# Allegro board sensor_board.brd
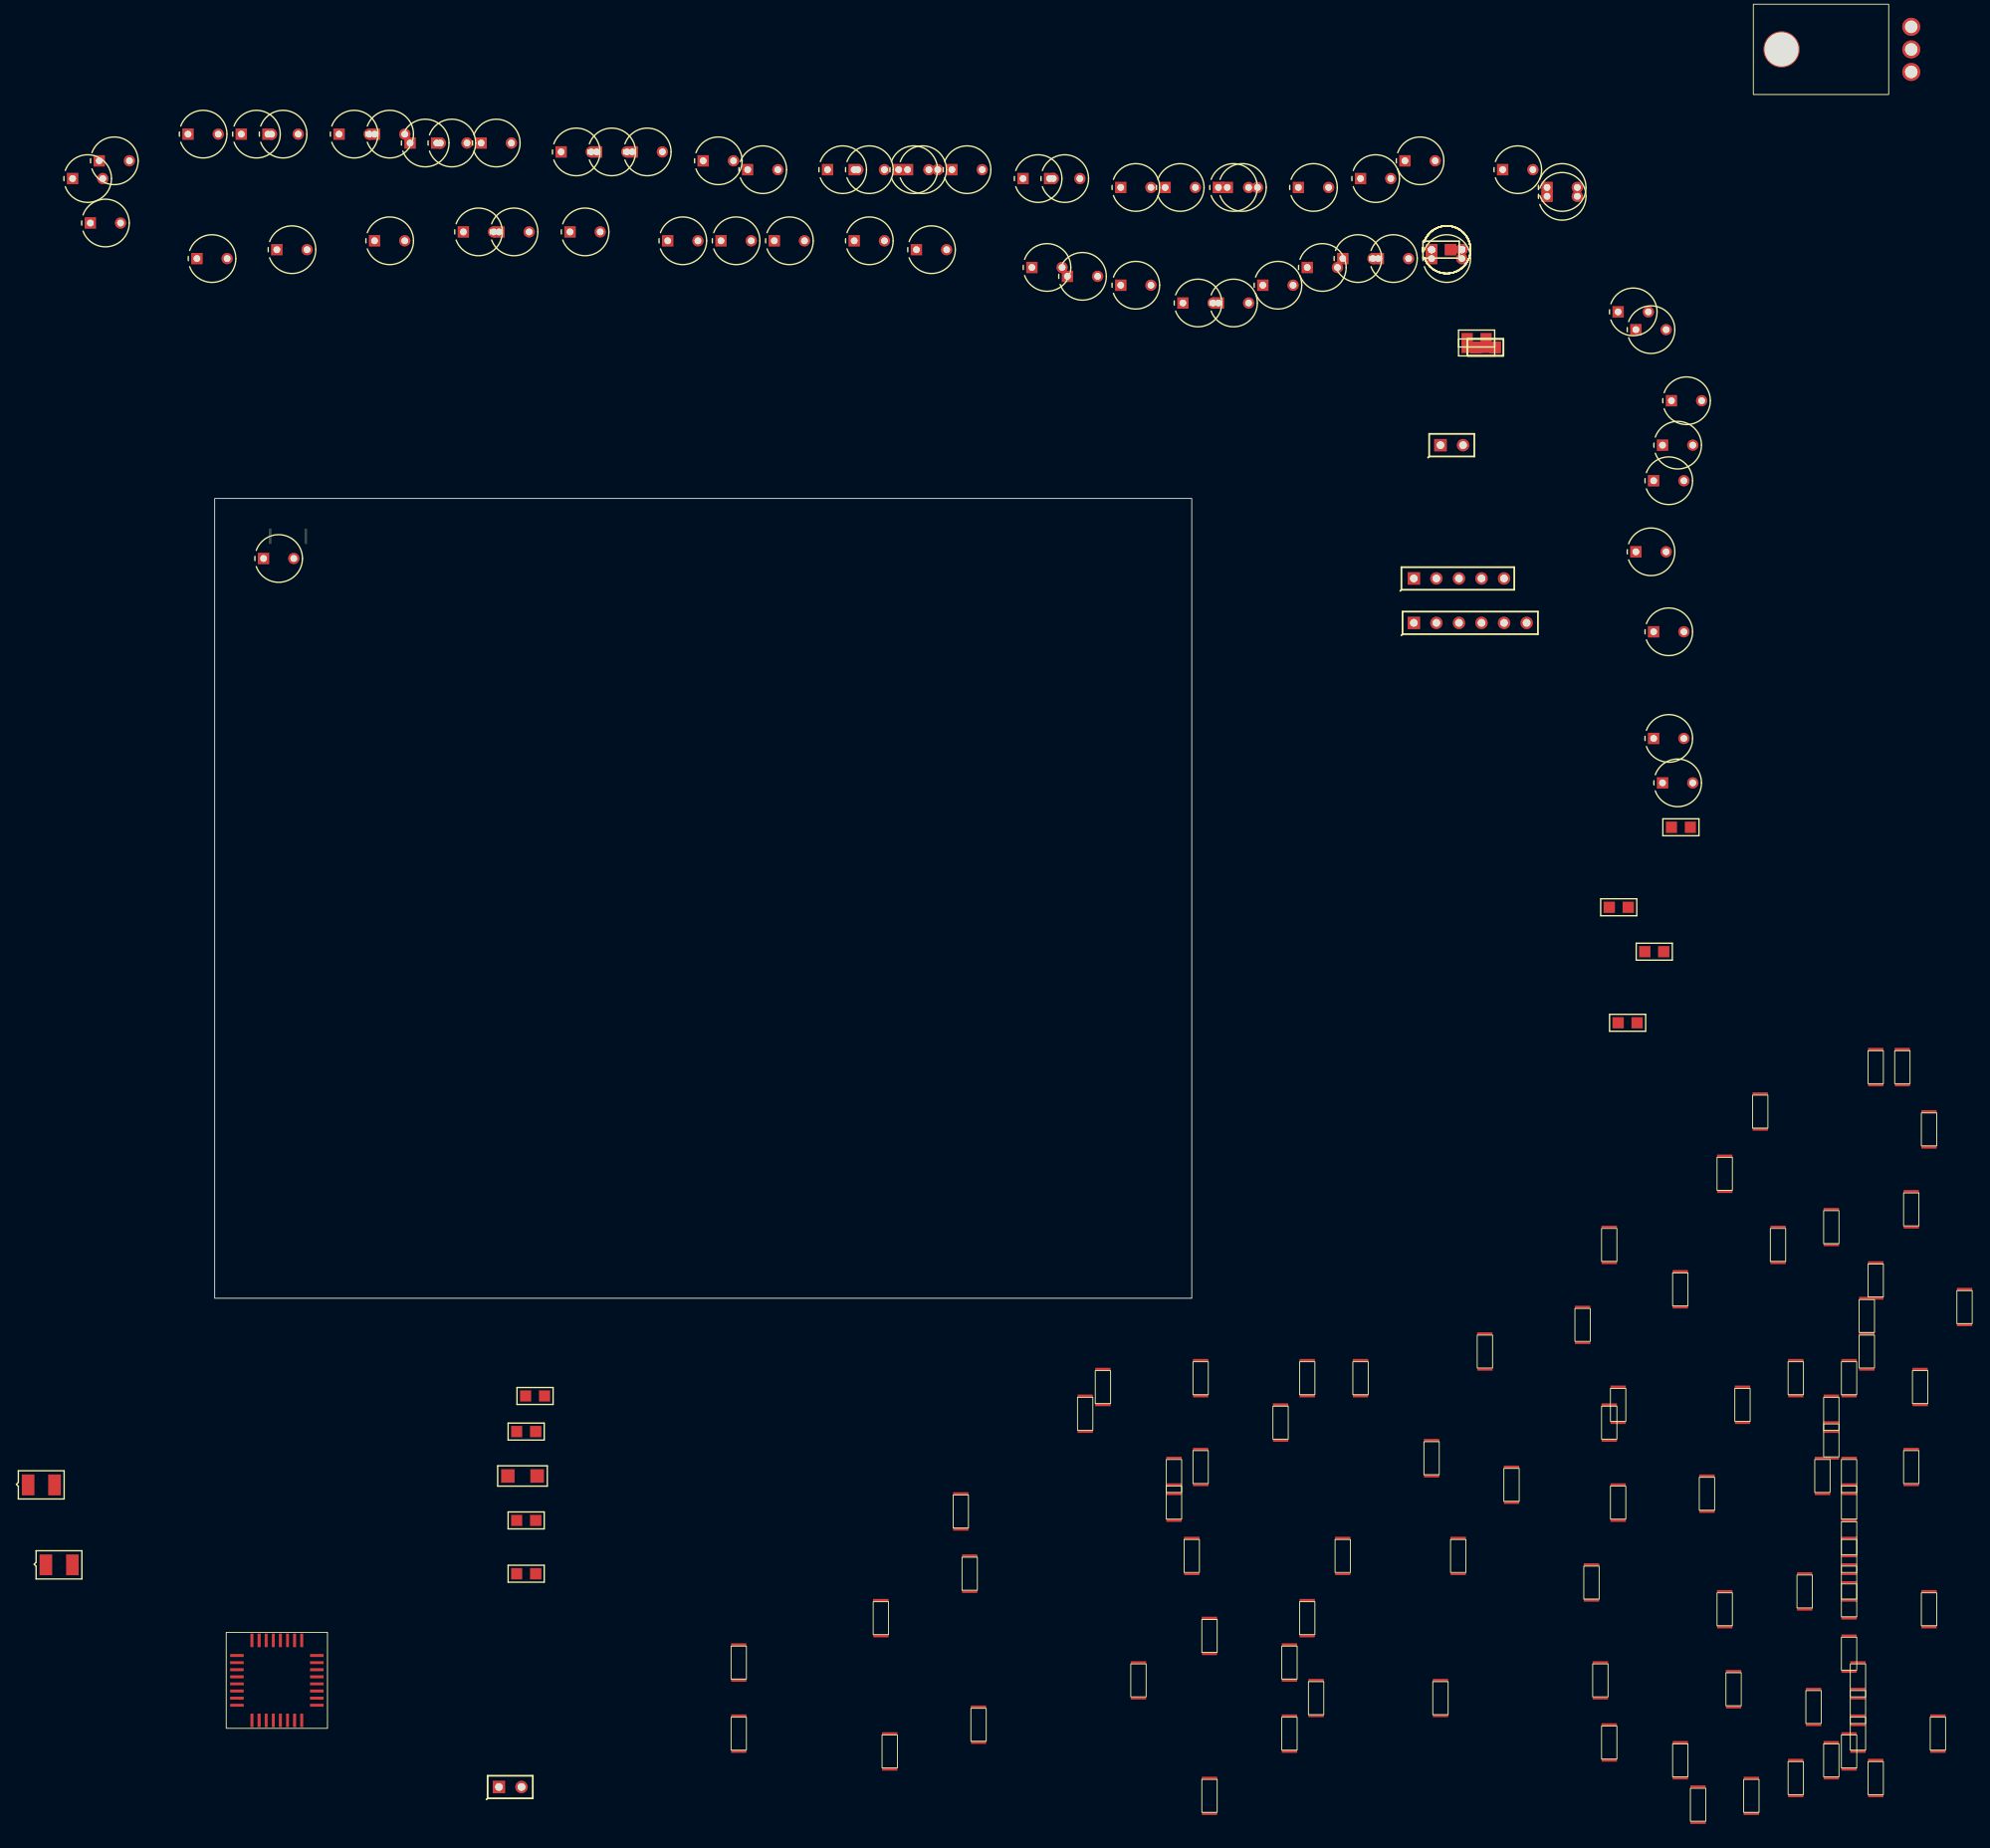
[diagram p0: board, top side]
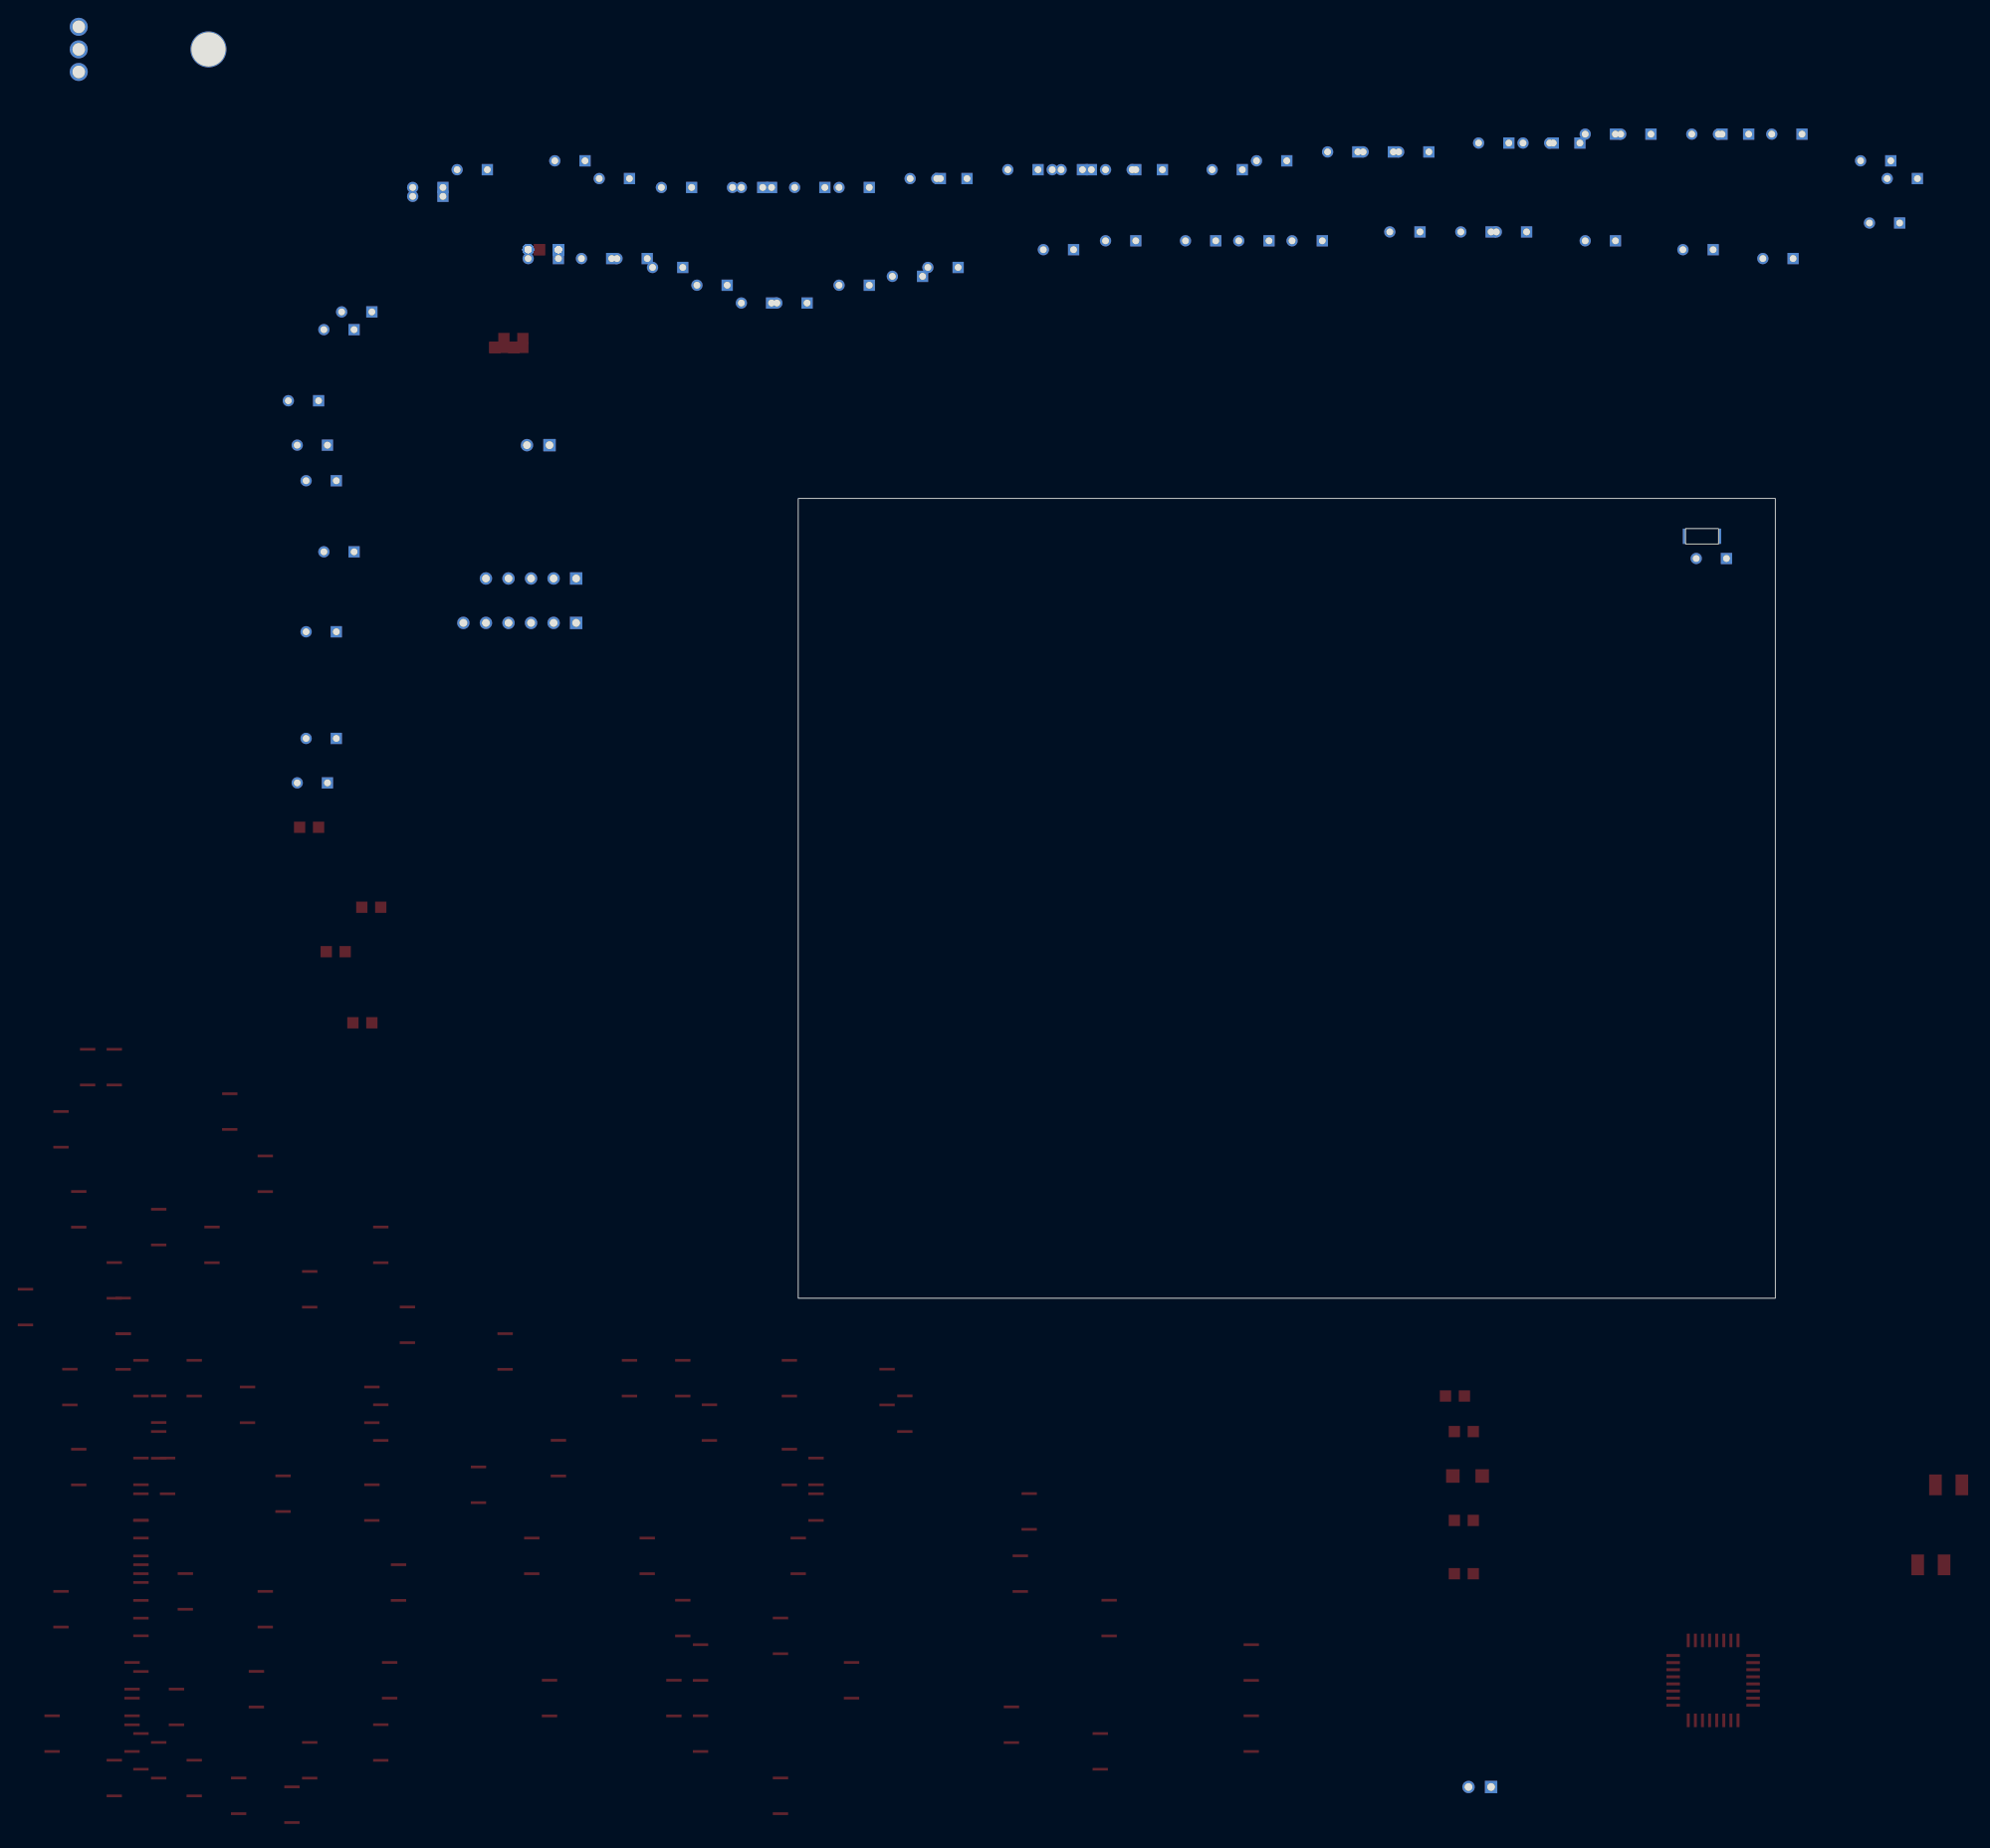
[diagram p1: board, bottom side, seen from below]

Outline 110 x 90 mm; copper layers: TOP, BOTTOM. Coordinates in mm from the lower left corner of the outline.
Outline path: rectangle 0,0 110,90

## Design rules (mm)
constraint set DEFAULT: min track width 0.1

## Placement (name value [footprint] x y rotation side)
C1  100n  [SMC0805]  35 -11 0 top
C2  100n  [SMC0805]  34 -15 0 top
C3  1uF  [SMC1206]  33 -20 0 top
C4  100n  [SMC0805]  34 -25 0 top
C5  100n  [SMC0805]  34 -31 0 top
D1  LED  [SMD1206]  -21 -21 0 top
D2  LED  [SMD1206]  -19 -30 0 top
D3  D1N4148  [SOD80]  6.25 85.75 90 bottom
D4  D1N4148  [SOD80]  84 -26 0 top
D5  D1N4148  [SOD80]  85 -33 0 top
D6  D1N4148  [SOD80]  75 -38 0 top
D7  D1N4148  [SOD80]  59 -43 0 top
D8  D1N4148  [SOD80]  59 -51 0 top
D9  D1N4148  [SOD80]  76 -53 0 top
D10  D1N4148  [SOD80]  86 -50 0 top
D11  D1N4148  [SOD80]  104 -45 0 top
D12  D1N4148  [SOD80]  112 -40 0 top
D13  D1N4148  [SOD80]  110 -31 0 top
D14  D1N4148  [SOD80]  111 -21 0 top
D15  D1N4148  [SOD80]  120 -16 0 top
D16  D1N4148  [SOD80]  137 -20 0 top
D17  D1N4148  [SOD80]  127 -31 0 top
D18  D1N4148  [SOD80]  123 -38 0 top
D19  D1N4148  [SOD80]  121 -43 0 top
D20  D1N4148  [SOD80]  124 -47 0 top
D21  D1N4148  [SOD80]  121 -51 0 top
D22  D1N4148  [SOD80]  138 -47 0 top
D23  D1N4148  [SOD80]  140 -31 0 top
D24  D1N4148  [SOD80]  146 -23 0 top
D25  D1N4148  [SOD80]  157 -16 0 top
D26  D1N4148  [SOD80]  158 -14 0 top
D27  D1N4148  [SOD80]  158 -25 0 top
D28  D1N4148  [SOD80]  155 -34 0 top
D29  D1N4148  [SOD80]  156 -45 0 top
D30  D1N4148  [SOD80]  157 -52 0 top
D31  D1N4148  [SOD80]  165 -54 0 top
D32  D1N4148  [SOD80]  171 -46 0 top
D33  D1N4148  [SOD80]  170 -37 0 top
D34  D1N4148  [SOD80]  168 -24 0 top
D35  D1N4148  [SOD80]  172 -14 0 top
D36  D1N4148  [SOD80]  178 -11 0 top
D37  D1N4148  [SOD80]  181 -22 0 top
D38  D1N4148  [SOD80]  179 -35 0 top
D39  D1N4148  [SOD80]  180 -48 0 top
D40  D1N4148  [SOD80]  187 -56 0 top
D41  D1N4148  [SOD80]  194 -51 0 top
D42  D1N4148  [SOD80]  193 -37 0 top
D43  D1N4148  [SOD80]  191 -21 0 top
D44  D1N4148  [SOD80]  192 -12 0 top
D45  D1N4148  [SOD80]  197 -3 0 top
D46  D1N4148  [SOD80]  182 6 0 top
D47  D1N4148  [SOD80]  176 4 0 top
D48  D1N4148  [SOD80]  165 -1 0 top
D49  D1N4148  [SOD80]  154 -5 0 top
D50  D1N4148  [SOD80]  143 -8 0 top
D51  D1N4148  [SOD80]  129 -11 0 top
D52  D1N4148  [SOD80]  123 -11 0 top
D53  D1N4148  [SOD80]  111 -11 0 top
D54  D1N4148  [SOD80]  100 -12 0 top
D55  D1N4148  [SOD80]  98 -15 0 top
D56  D1N4148  [SOD80]  108 -22 0 top
D57  D1N4148  [SOD80]  108 -25 0 top
D58  D1N4148  [SOD80]  157 4 0 top
D59  D1N4148  [SOD80]  170 12 0 top
D60  D1N4148  [SOD80]  174 19 0 top
D61  D1N4148  [SOD80]  187 24 0 top
D62  D1N4148  [SOD80]  190 24 0 top
D63  D1N4148  [SOD80]  193 17 0 top
D64  D1N4148  [SOD80]  191 8 0 top
D65  D1N4148  [SOD80]  187 0 0 top
D66  D1N4148  [SOD80]  186 -4 0 top
D67  D1N4148  [SOD80]  186 -8 0 top
D68  D1N4148  [SOD80]  184 -11 0 top
D69  D1N4148  [SOD80]  182 -15 0 top
D70  D1N4148  [SOD80]  182 -18 0 top
D71  D1N4148  [SOD80]  184 -22 0 top
D72  D1N4148  [SOD80]  184 -25 0 top
D73  D1N4148  [SOD80]  184 -29 0 top
D74  D1N4148  [SOD80]  184 -31 0 top
D75  D1N4148  [SOD80]  184 -34 0 top
D76  D1N4148  [SOD80]  184 -36 0 top
D77  D1N4148  [SOD80]  184 -42 0 top
D78  D1N4148  [SOD80]  185 -45 0 top
D79  D1N4148  [SOD80]  185 -48 0 top
D80  D1N4148  [SOD80]  185 -51 0 top
D81  D1N4148  [SOD80]  184 -53 0 top
D82  D1N4148  [SOD80]  182 -54 0 top
D83  D1N4148  [SOD80]  178 -56 0 top
D84  D1N4148  [SOD80]  173 -58 0 top
D85  D1N4148  [SOD80]  167 -59 0 top
D86  D1N4148  [SOD80]  112 -58 0 top
J1  BOARD_INTERFACE  [SIPTML5005]  135 81 0 top
J2  JUMPER  [SIPTML2002]  32 -55 0 top
J3  PROGRAMMER  [SIPTML6006]  135 76 0 top
Q1  IRF9530N/TO  [TO220ABH]  191 138 0 top
R1  1k  [SMR0805]  158 31 0 top
R2  1k  [SMR0805]  161 39 0 top
R3  100  [SMR0805]  157 44 0 top
R4  10k  [SMR0805]  164 53 0 top
R5  5k-20k  [LDR1_NTE]  5.5 83.25 0 top
R6  5k-20k  [LDR1_NTE]  163 58 0 top
R7  5k-20k  [LDR1_NTE]  162 63 0 top
R8  5k-20k  [LDR1_NTE]  162 75 0 top
R9  5k-20k  [LDR1_NTE]  160 84 0 top
R10  5k-20k  [LDR1_NTE]  162 92 0 top
R11  5k-20k  [LDR1_NTE]  163 96 0 top
R12  5k-20k  [LDR1_NTE]  164 101 0 top
R13  5k-20k  [LDR1_NTE]  160 109 0 top
R14  5k-20k  [LDR1_NTE]  158 111 0 top
R15  5k-20k  [LDR1_NTE]  150 124 0 top
R16  5k-20k  [LDR1_NTE]  150 125 0 top
R17  5k-20k  [LDR1_NTE]  145 127 0 top
R18  5k-20k  [LDR1_NTE]  134 128 0 top
R19  5k-20k  [LDR1_NTE]  129 126 0 top
R20  5k-20k  [LDR1_NTE]  122 125 0 top
R21  5k-20k  [LDR1_NTE]  114 125 0 top
R22  5k-20k  [LDR1_NTE]  113 125 0 top
R23  5k-20k  [LDR1_NTE]  107 125 0 top
R24  5k-20k  [LDR1_NTE]  102 125 0 top
R25  5k-20k  [LDR1_NTE]  94 126 0 top
R26  5k-20k  [LDR1_NTE]  91 126 0 top
R27  5k-20k  [LDR1_NTE]  83 127 0 top
R28  5k-20k  [LDR1_NTE]  78 127 0 top
R29  5k-20k  [LDR1_NTE]  77 127 0 top
R30  5k-20k  [LDR1_NTE]  72 127 0 top
R31  5k-20k  [LDR1_NTE]  69 127 0 top
R32  5k-20k  [LDR1_NTE]  60 127 0 top
R33  5k-20k  [LDR1_NTE]  55 128 0 top
R34  5k-20k  [LDR1_NTE]  47 129 0 top
R35  5k-20k  [LDR1_NTE]  43 129 0 top
R36  5k-20k  [LDR1_NTE]  39 129 0 top
R37  5k-20k  [LDR1_NTE]  30 130 0 top
R38  5k-20k  [LDR1_NTE]  25 130 0 top
R39  5k-20k  [LDR1_NTE]  22 130 0 top
R40  5k-20k  [LDR1_NTE]  18 131 0 top
R41  5k-20k  [LDR1_NTE]  14 131 0 top
R42  5k-20k  [LDR1_NTE]  6 131 0 top
R43  5k-20k  [LDR1_NTE]  3 131 0 top
R44  5k-20k  [LDR1_NTE]  -3 131 0 top
R45  5k-20k  [LDR1_NTE]  -13 128 0 top
R46  5k-20k  [LDR1_NTE]  -16 126 0 top
R47  5k-20k  [LDR1_NTE]  -14 121 0 top
R48  5k-20k  [LDR1_NTE]  -2 117 0 top
R49  5k-20k  [LDR1_NTE]  7 118 0 top
R50  5k-20k  [LDR1_NTE]  18 119 0 top
R51  5k-20k  [LDR1_NTE]  28 120 0 top
R52  5k-20k  [LDR1_NTE]  32 120 0 top
R53  5k-20k  [LDR1_NTE]  40 120 0 top
R54  5k-20k  [LDR1_NTE]  51 119 0 top
R55  5k-20k  [LDR1_NTE]  57 119 0 top
R56  5k-20k  [LDR1_NTE]  63 119 0 top
R57  5k-20k  [LDR1_NTE]  72 119 0 top
R58  5k-20k  [LDR1_NTE]  79 118 0 top
R59  5k-20k  [LDR1_NTE]  92 116 0 top
R60  5k-20k  [LDR1_NTE]  96 115 0 top
R61  5k-20k  [LDR1_NTE]  102 114 0 top
R62  5k-20k  [LDR1_NTE]  109 112 0 top
R63  5k-20k  [LDR1_NTE]  113 112 0 top
R64  5k-20k  [LDR1_NTE]  118 114 0 top
R65  5k-20k  [LDR1_NTE]  123 116 0 top
R66  5k-20k  [LDR1_NTE]  127 117 0 top
R67  5k-20k  [LDR1_NTE]  131 117 0 top
R68  5k-20k  [LDR1_NTE]  137 117 0 top
R69  5k-20k  [LDR1_NTE]  137 118 0 top
R70  5k-20k  [LDR1_NTE]  137 118 0 top
R71  5k-20k  [LDR1_NTE]  137 118 0 top
R72  5k-20k  [LDR1_NTE]  137 118 0 top
R73  5k-20k  [LDR1_NTE]  137 118 0 top
R74  5k-20k  [LDR1_NTE]  137 118 0 top
R75  5k-20k  [LDR1_NTE]  137 118 0 top
R76  5k-20k  [LDR1_NTE]  137 118 0 top
R77  5k-20k  [LDR1_NTE]  137 118 0 top
R78  5k-20k  [LDR1_NTE]  137 118 0 top
R79  5k-20k  [LDR1_NTE]  137 118 0 top
R80  5k-20k  [LDR1_NTE]  137 118 0 top
R81  5k-20k  [LDR1_NTE]  137 118 0 top
R82  5k-20k  [LDR1_NTE]  137 118 0 top
R83  5k-20k  [LDR1_NTE]  137 118 0 top
R84  5k-20k  [LDR1_NTE]  137 118 0 top
R85  5k-20k  [LDR1_NTE]  137 118 0 top
R86  5k-20k  [LDR1_NTE]  137 118 0 top
R87  5k-20k  [LDR1_NTE]  137 118 0 top
R88  5k-20k  [LDR1_NTE]  137 118 0 top
R89  1k  [SMR0805]  137 118 0 top
R90  1k  [SMR0805]  137 118 0 top
R91  1k  [SMR0805]  141 108 0 top
R92  1k  [SMR0805]  141 107 0 top
R93  1k  [SMR0805]  142 107 0 top
R94  1k  [SMR0805]  142 107 0 top
R95  1k  [SMR0805]  142 107 0 top
R96  1k  [SMR0805]  142 107 0 top
SW1  SW PUSHBUTTON  [SIPTML2002]  138 96 0 top
U1  ATMEGA168PV  [TQFP32]  7 -43 0 top

## Library data of the parts
C1-C5 = CAP NP
D1 D2 = LED_1
D3-D86 = 1N4148
J1 = CON5
J2 = JUMPER
J3 = CON6
Q1 = IRF9530N/TO_0
R1-R4 R89-R96 = R
R5-R88 = LDR: User Part Number: PN; Tolerance: TOL
SW1 = SW PUSHBUTTON
U1 = ATMEGA168PV_1

## Footprints (pads in the part's own frame, mm; a bottom-side part is the same pattern mirrored in y, then rotated)
LDR1_NTE
  rect 1.27x1.27 hole 0.762: 1(0,0)
  round 1.27 hole 0.762: 2(3.404,0)
SIPTML2002
  rect 1.397x1.397 hole 0.864: 1(0,0)
  round 1.397 hole 0.864: 2(2.54,0)
SIPTML5005
  rect 1.397x1.397 hole 0.864: 1(0,0)
  round 1.397 hole 0.864: 2(2.54,0) 3(5.08,0) 4(7.62,0) 5(10.16,0)
SIPTML6006
  rect 1.397x1.397 hole 0.864: 1(0,0)
  round 1.397 hole 0.864: 2(2.54,0) 3(5.08,0) 4(7.62,0) 5(10.16,0) 6(12.7,0)
SMC0805
  rect 1.27x1.27 smd: 1(0,0) 2(2.134,0)
SMC1206
  rect 1.524x1.524 smd: 1(0,0) 2(3.302,0)
SMD1206
  rect 1.422x2.337 smd: A(2.972,0) C(0,0)
SMR0805
  rect 1.27x1.27 smd: 1(0,0) 2(2.134,0)
SOD80
  rect 1.727x0.305 smd: 1(0,0) 2(-0.004,4.016)
TO220ABH
  round 2.032 hole 1.397: 1(0,0) 2(0,2.54) 3(0,5.08)
  round 4.064 hole 3.81: 4(-14.605,2.54)
TQFP32
  rect 1.524x0.33 smd: 1(-4.5,2.8) 2(-4.5,2) 3(-4.5,1.2) 4(-4.5,0.4) 5(-4.5,-0.4) 6(-4.5,-1.2) 7(-4.5,-2) 8(-4.5,-2.8) 17(4.5,-2.8) 18(4.5,-2) 19(4.5,-1.2) 20(4.5,-0.4) 21(4.5,0.4) 22(4.5,1.2) 23(4.5,2) 24(4.5,2.8)
  rect 0.33x1.524 smd: 9(-2.8,-4.5) 10(-2,-4.5) 11(-1.2,-4.5) 12(-0.4,-4.5) 13(0.4,-4.5) 14(1.2,-4.5) 15(2,-4.5) 16(2.8,-4.5) 25(2.8,4.5) 26(2,4.5) 27(1.2,4.5) 28(0.4,4.5) 29(-0.4,4.5) 30(-1.2,4.5) 31(-2,4.5) 32(-2.8,4.5)

## Nets
GND: C1.2 C2.2 C3.2 C4.2 C5.2 J1.5 J3.6 R1.1 R2.1 R3.2 R89.2 R90.2 R91.2 R92.2 R93.2 R94.2 R95.2 R96.2 SW1.1 U1.3 U1.5 U1.21
VCC: C1.1 C2.1 C3.1 C4.1 C5.1 J2.1 Q1.3(S) R4.2 U1.4 U1.6(VCC#6) U1.18 U1.20
ADC0: D3.2 D4.2 D5.2 D6.2 D7.2 D8.2 D9.2 D10.2 D11.2 D12.2 D83.2 R89.1 U1.23
ADC1: D13.2 D14.2 D15.2 D16.2 D17.2 D18.2 D19.2 D20.2 D21.2 D22.2 R90.1 U1.24
ADC2: D23.2 D24.2 D25.2 D26.2 D27.2 D28.2 D29.2 D30.2 D31.2 D32.2 D84.2 R91.1 U1.25
ADC3: D33.2 D34.2 D35.2 D36.2 D37.2 D38.2 D39.2 D40.2 D41.2 D42.2 R92.1 U1.26
ADC4: D43.2 D44.2 D45.2 D46.2 D47.2 D48.2 D49.2 D50.2 D51.2 D52.2 D85.2 R93.1 U1.27
ADC5: D53.2 D54.2 D55.2 D56.2 D57.2 D58.2 D59.2 D60.2 D61.2 D62.2 R94.1 U1.28
ADC6: D63.2 D64.2 D65.2 D66.2 D67.2 D68.2 D69.2 D70.2 D71.2 D72.2 D86.2 R95.1 U1.19
ADC7: D73.2 D74.2 D75.2 D76.2 D77.2 D78.2 D79.2 D80.2 D81.2 D82.2 R96.1 U1.22
COL_SELECT_0: R5.1 R15.1 R25.1 R35.1 R45.1 R55.1 R65.1 R75.1 U1.30
COL_SELECT_1: R6.1 R16.1 R26.1 R36.1 R46.1 R56.1 R66.1 R76.1 U1.31
COL_SELECT_2: R7.1 R17.1 R27.1 R37.1 R47.1 R57.1 R67.1 R77.1 U1.32
COL_SELECT_3: R8.1 R18.1 R28.1 R38.1 R48.1 R58.1 R68.1 R78.1 U1.1
COL_SELECT_4: R9.1 R19.1 R29.1 R39.1 R49.1 R59.1 R69.1 R79.1 U1.2
COL_SELECT_5: R10.1 R20.1 R30.1 R40.1 R50.1 R60.1 R70.1 R80.1 U1.9
COL_SELECT_6: R11.1 R21.1 R31.1 R41.1 R51.1 R61.1 R71.1 R81.1 U1.10
COL_SELECT_7: R12.1 R22.1 R32.1 R42.1 R52.1 R62.1 R72.1 R82.1 U1.11
COL_SELECT_8: R13.1 R23.1 R33.1 R43.1 R53.1 R63.1 R73.1 R83.1 U1.12
COL_SELECT_9: R14.1 R24.1 R34.1 R44.1 R54.1 R64.1 R74.1 R84.1 U1.13
COL_SELECT_10: R85.1 R86.1 R87.1 R88.1 U1.14
MISO: J1.3 J3.1 U1.16
MOSI: J1.4 J3.4 U1.15
N00105_M_C_R-D: D83.1 R85.2
N00105_M_C_R-D2: D84.1 R86.2
N00105_M_C_R-D4: D85.1 R87.2
N00105_M_C_R-D6: D86.1 R88.2
N00105_M_COL12_R-D: D4.1 R6.2
N00105_M_COL12_R-D1: D14.1 R16.2
N00105_M_COL12_R-D2: D24.1 R26.2
N00105_M_COL12_R-D3: D34.1 R36.2
N00105_M_COL12_R-D4: D44.1 R46.2
N00105_M_COL12_R-D5: D54.1 R56.2
N00105_M_COL12_R-D6: D64.1 R66.2
N00105_M_COL12_R-D7: D74.1 R76.2
N00105_M_COL13_R-D: D5.1 R7.2
N00105_M_COL13_R-D1: D15.1 R17.2
N00105_M_COL13_R-D2: D25.1 R27.2
N00105_M_COL13_R-D3: D35.1 R37.2
N00105_M_COL13_R-D4: D45.1 R47.2
N00105_M_COL13_R-D5: D55.1 R57.2
N00105_M_COL13_R-D6: D65.1 R67.2
N00105_M_COL13_R-D7: D75.1 R77.2
N00105_M_COL14_R-D: D6.1 R8.2
N00105_M_COL14_R-D1: D16.1 R18.2
N00105_M_COL14_R-D2: D26.1 R28.2
N00105_M_COL14_R-D3: D36.1 R38.2
N00105_M_COL14_R-D4: D46.1 R48.2
N00105_M_COL14_R-D5: D56.1 R58.2
N00105_M_COL14_R-D6: D66.1 R68.2
N00105_M_COL14_R-D7: D76.1 R78.2
N00105_M_COL15_R-D: D7.1 R9.2
N00105_M_COL15_R-D1: D17.1 R19.2
N00105_M_COL15_R-D2: D27.1 R29.2
N00105_M_COL15_R-D3: D37.1 R39.2
N00105_M_COL15_R-D4: D47.1 R49.2
N00105_M_COL15_R-D5: D57.1 R59.2
N00105_M_COL15_R-D6: D67.1 R69.2
N00105_M_COL15_R-D7: D77.1 R79.2
N00105_M_COL16_R-D: D8.1 R10.2
N00105_M_COL16_R-D1: D18.1 R20.2
N00105_M_COL16_R-D2: D28.1 R30.2
N00105_M_COL16_R-D3: D38.1 R40.2
N00105_M_COL16_R-D4: D48.1 R50.2
N00105_M_COL16_R-D5: D58.1 R60.2
N00105_M_COL16_R-D6: D68.1 R70.2
N00105_M_COL16_R-D7: D78.1 R80.2
N00105_M_COL17_R-D: D9.1 R11.2
N00105_M_COL17_R-D1: D19.1 R21.2
N00105_M_COL17_R-D2: D29.1 R31.2
N00105_M_COL17_R-D3: D39.1 R41.2
N00105_M_COL17_R-D4: D49.1 R51.2
N00105_M_COL17_R-D5: D59.1 R61.2
N00105_M_COL17_R-D6: D69.1 R71.2
N00105_M_COL17_R-D7: D79.1 R81.2
N00105_M_COL18_R-D: D10.1 R12.2
N00105_M_COL18_R-D1: D20.1 R22.2
N00105_M_COL18_R-D2: D30.1 R32.2
N00105_M_COL18_R-D3: D40.1 R42.2
N00105_M_COL18_R-D4: D50.1 R52.2
N00105_M_COL18_R-D5: D60.1 R62.2
N00105_M_COL18_R-D6: D70.1 R72.2
N00105_M_COL18_R-D7: D80.1 R82.2
N00105_M_COL19_R-D: D11.1 R13.2
N00105_M_COL19_R-D1: D21.1 R23.2
N00105_M_COL19_R-D2: D31.1 R33.2
N00105_M_COL19_R-D3: D41.1 R43.2
N00105_M_COL19_R-D4: D51.1 R53.2
N00105_M_COL19_R-D5: D61.1 R63.2
N00105_M_COL19_R-D6: D71.1 R73.2
N00105_M_COL19_R-D7: D81.1 R83.2
N00105_M_COL20_R-D: D12.1 R14.2
N00105_M_COL20_R-D1: D22.1 R24.2
N00105_M_COL20_R-D2: D32.1 R34.2
N00105_M_COL20_R-D3: D42.1 R44.2
N00105_M_COL20_R-D4: D52.1 R54.2
N00105_M_COL20_R-D5: D62.1 R64.2
N00105_M_COL20_R-D6: D72.1 R74.2
N00105_M_COL20_R-D7: D82.1 R84.2
N00105_M_COL_R-D: D3.1 R5.2
N00105_M_COL_R-D1: D13.1 R15.2
N00105_M_COL_R-D2: D23.1 R25.2
N00105_M_COL_R-D3: D33.1 R35.2
N00105_M_COL_R-D4: D43.1 R45.2
N00105_M_COL_R-D5: D53.1 R55.2
N00105_M_COL_R-D6: D63.1 R65.2
N00105_M_COL_R-D7: D73.1 R75.2
RST: J3.5 R4.1 SW1.2 U1.29
SCK: J1.2 J3.3 U1.17
V_PROGRAMMER: J2.2 J3.2
N03058: D1.A U1.7
N04826: J1.1 Q1.2
N11924: Q1.1 R3.1
N12703: D2.A U1.8
N12910: D2.C R2.2
N12914: D1.C R1.2

Pads without a net: Q1 4
